# Altium PCB PCB1.PcbDoc
Units mil, origin at the board's own origin, x right, y up, seen from the top; angles counter-clockwise.
Board outline 1110 x 1515 mil, 4 copper layers (Top Layer, Layer 1, Layer 2, Bottom Layer), stack 23.756 mil thick; 30 components, 43 nets, 163 pads, 46 vias.
Unrouted connection lines stored in the file: 21.
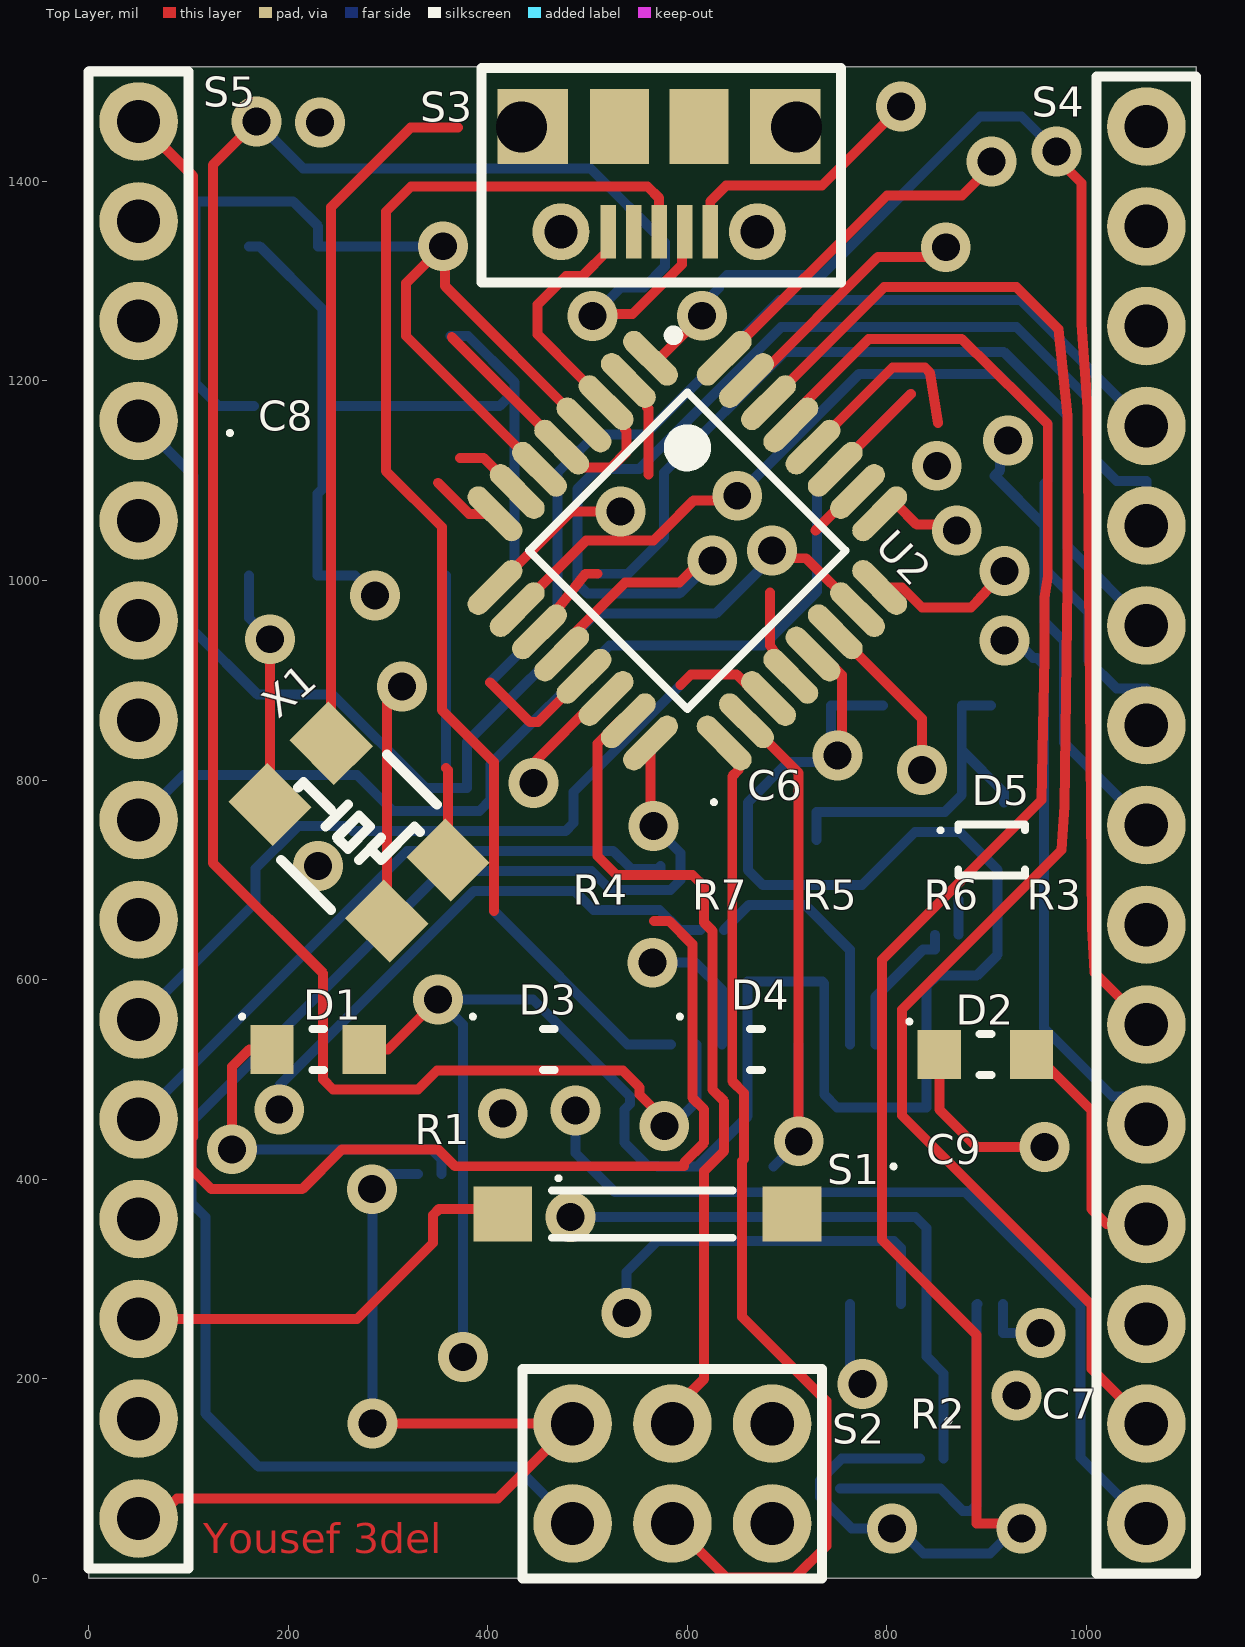
[diagram p0: Top Layer view]
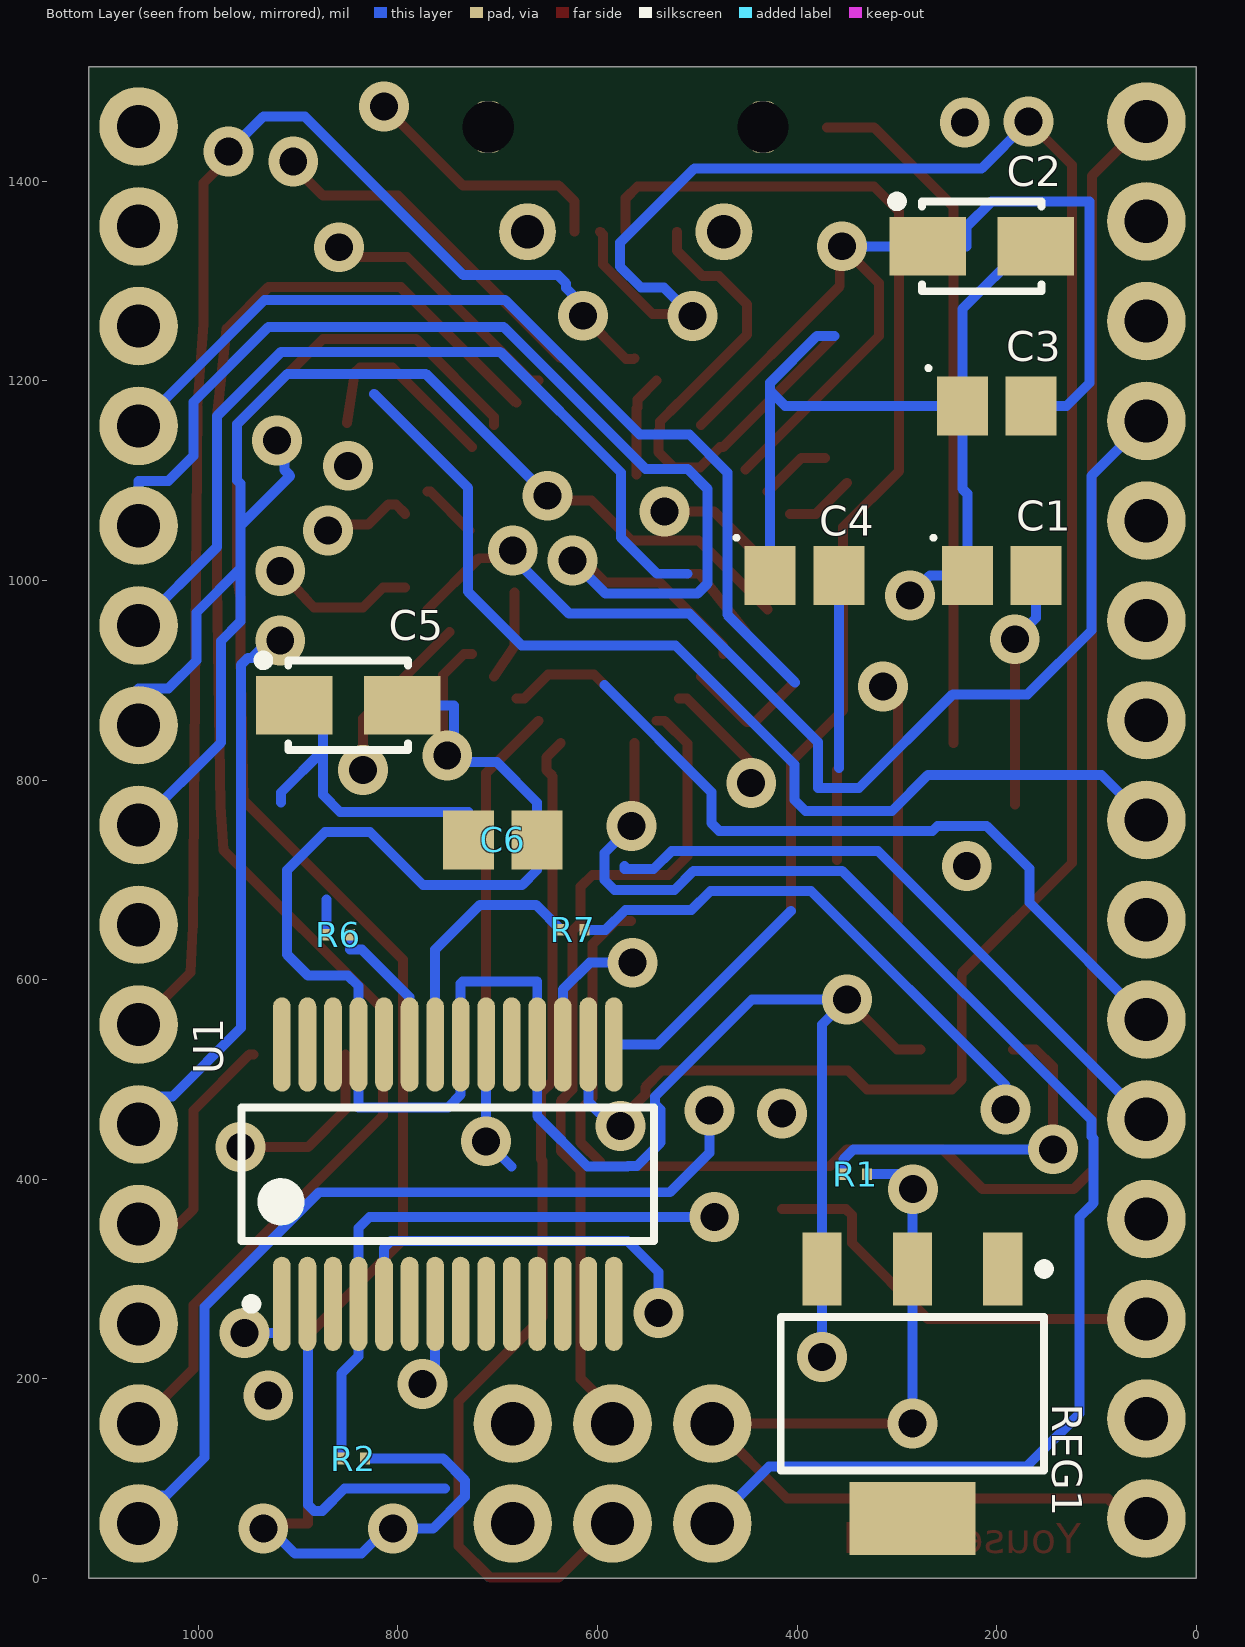
[diagram p1: Bottom Layer view, seen from below]
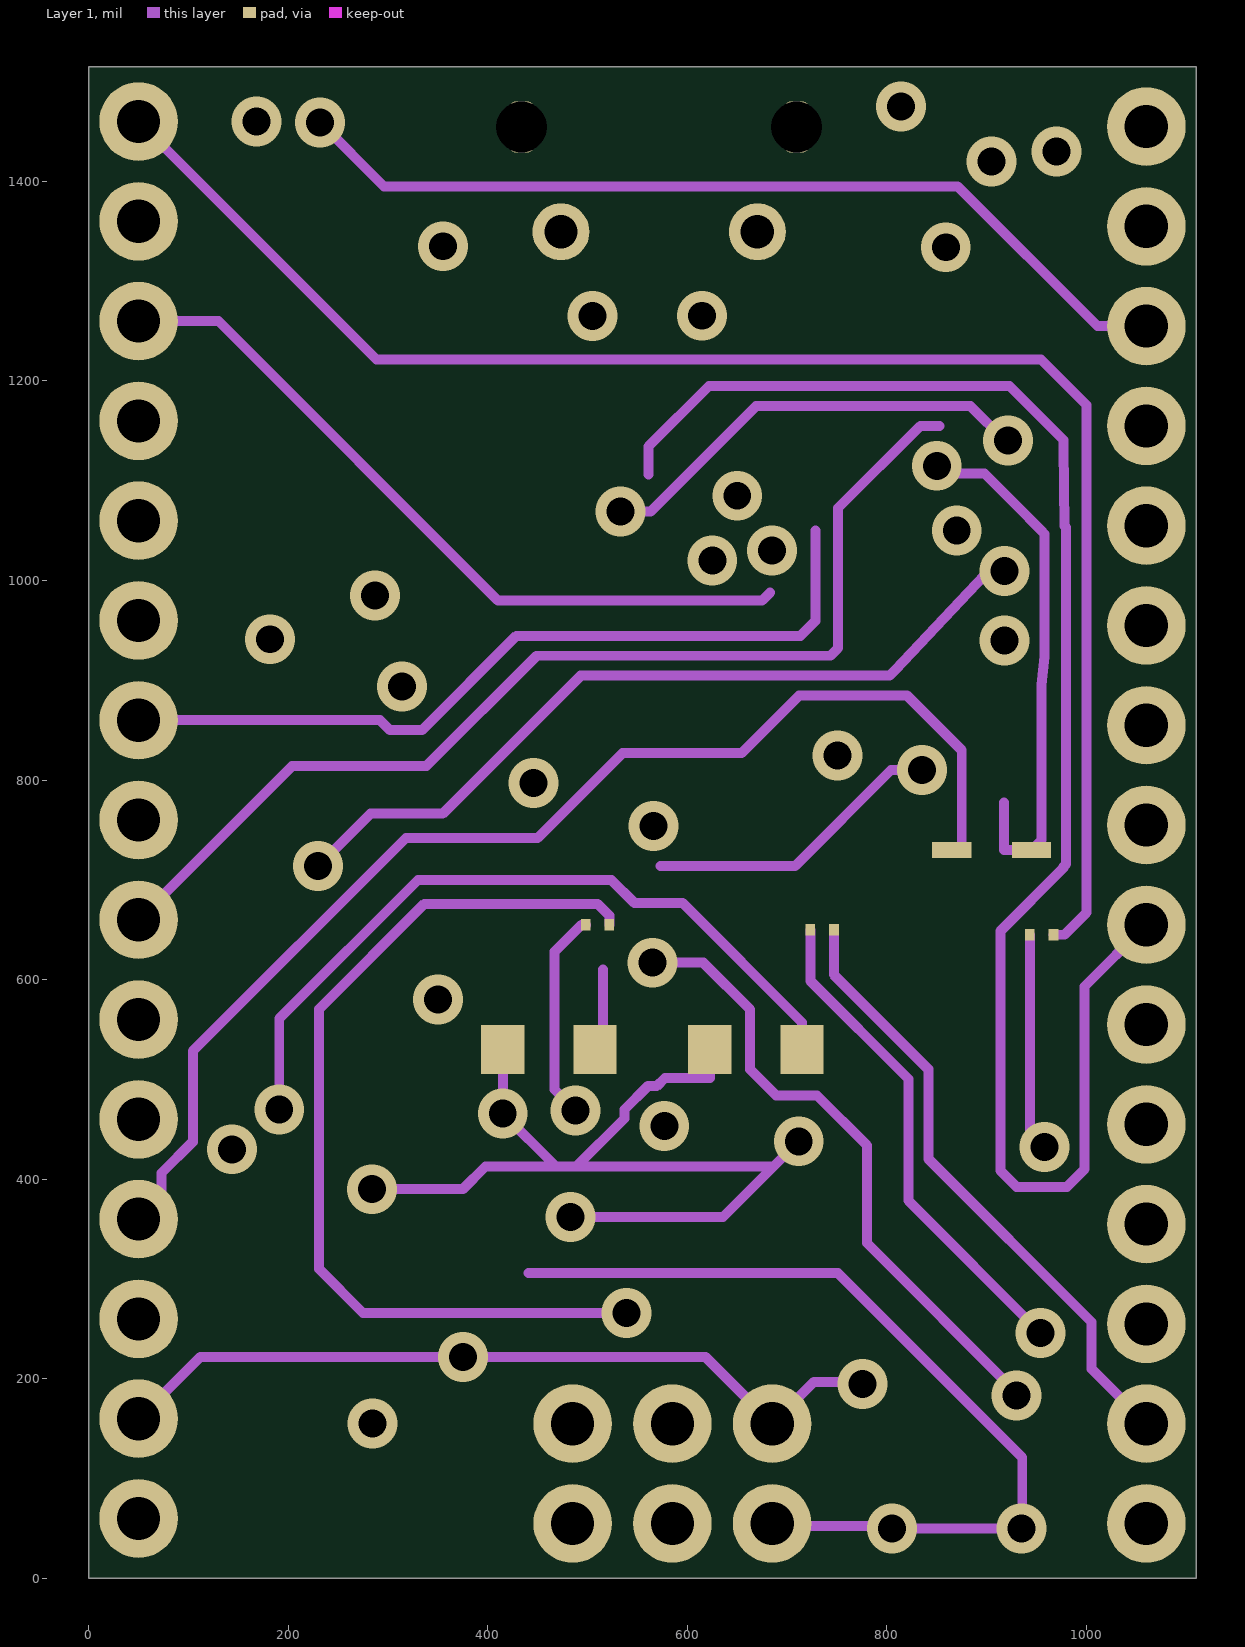
[diagram p2: Layer 1]
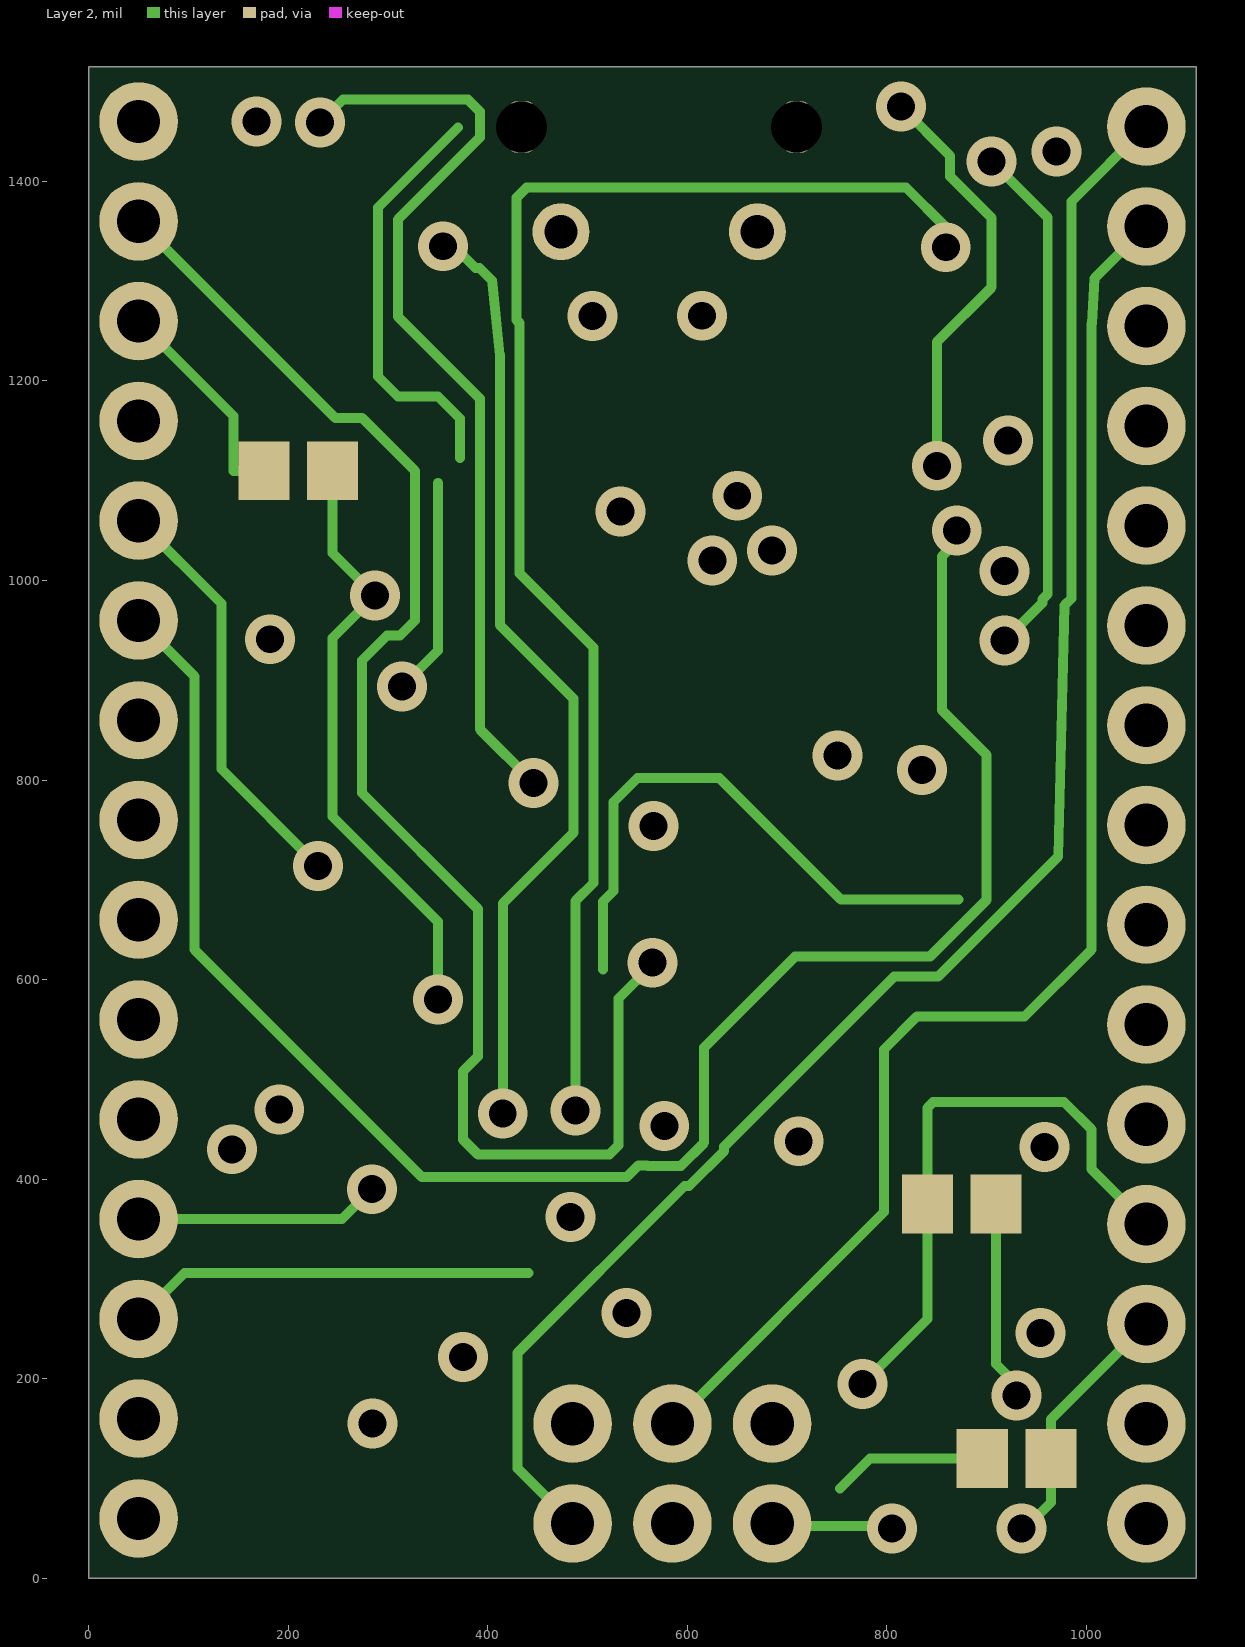
[diagram p3: Layer 2]

## Layer stack, top to bottom
Top Solder: solder mask 0.4, Solder Resist, Dk 3.5
Top Layer: signal copper 1.4
Dielectric 2: prepreg 2.8, PP-006, Dk 4.1
Layer 1: signal copper 1.378
Dielectric 1: dielectric 12.6, FR-4, Dk 4.8
Layer 2: signal copper 1.378
Dielectric 3: prepreg 2.8, PP-006, Dk 4.1
Bottom Layer: signal copper 1.4
Bottom Solder: solder mask 0.4, Solder Resist, Dk 3.5

## Board outline
0,0 1110,0 1110,1515 0,1515

## Design rules (kind name [scope] priority, off if disabled: settings)
Clearance [All] p1: gap=10 ignorepadtopadclearanceinfootprint=FALSE except(5: SMDPad-SMDPad)
PolygonConnect [All] p1: connectstyle=Relief reliefconductorwidth=10 reliefentries=4 polygonreliefangle="90 Angle" airgapwidth=10
RoutingVias [All] p1: holewidth=28 width=50 viastyle="Through Hole" minholewidth=28 minwidth=50 maxholewidth=28 maxwidth=50
SolderMaskExpansion [All] p1: expansion=4 istentingtop=FALSE
SupplyNets "Schematic Supply Nets_3" [InNet('VUSB')] p1: voltage=0.000
SupplyNets "Schematic Supply Nets_2" [InNet('AVCC')] p2: voltage=0.000
SupplyNets "Schematic Supply Nets_1" [InNet('+3V3')] p3: voltage=0.000
SupplyNets "Schematic Supply Nets" [InNet('GND')] p4: voltage=0.000
Width [All] p1: maxlimit=10 minlimit=10 preferedwidth=10
30 further rules are at their usual default settings.

## Components (designator, comment, footprint, x,y, rotation, side; value= is the part's Value field where it differs from the comment)
C1 "C0805C180J5GACTU" CAPCP2012X09N#1 195,1005 r180 bottom
C2 "Capacitor SMT Tantalum" "CASE A - 3216X18" 215,1335 r180 bottom value=4.7µF
C3 "100nF Ceramic Multilayer Capacitor_1" CAPCP2012X09N#1 200,1175 r180 bottom
C4 "C0805C180J5GACTU" CAPCP2012X09N#1 392.51,1005 r180 bottom
C5 "Capacitor SMT Tantalum" "CASE A - 3216X18" 850,875 r180 bottom value=4.7µF
C6 "100nF Ceramic Multilayer Capacitor_1" CAPCP2012X09N#1 695,740 r0 bottom
C7 "100nF Ceramic Multilayer Capacitor_1" CAPCP2012X09N#2 930,120 r0 top
C8 "100nF Ceramic Multilayer Capacitor_1" CAPCP2012X09N#3 210,1110 r0 top
C9 "100nF Ceramic Multilayer Capacitor_1" CAPCP2012X09N#3 875,375 r0 top
D1 "Kingbright Blue LED, 60 mcd 120 ° 0805" LED1913X12NBLUE 230,530 r0 top
D2 "Light-Emitting Diode" LED1913X12NRED#1 898.74,525 r0 top
D3 "Kingbright Red LED, 100 mcd 120 ° 0805" LED1913X12NRED#2 461.26,530 r0 top
D4 "Kingbright Green LED, 70 mcd 120 ° 0805" LED1913X12NGREEN 668.74,530 r0 top
D5 "Panasonic DB2J20900L Schottky Diode, 0.5A, 20V, 2.4ns, 2-Pin SMini2 F5 B" DIOM1712X07N 905,730 r0 top
R1 "Resistor" RES_ERJU01J183C#1 341.81,405 r0 bottom value=330
R2 "Resistor" RES_ERJU01J183C#1 845,120 r0 bottom value=1K
R3 "Resistor" RES_ERJU01J183C#2 955,645 r0 top value=1K
R4 "Resistor" RES_ERJU01J183C#2 510,655 r0 top value=1K
R5 "Resistor" RES_ERJU01J183C#2 735,650 r0 top value=1K
R6 "Resistor" RES_ERJU01J183C#1 860,645 r0 bottom value=330
R7 "Resistor" RES_ERJU01J183C#1 625,650 r0 bottom value=330
REG1 "LM1117MP-5.0/NOPB, Low Dropout Voltage Regulator, 1.5A, 5 V ±1%, 4-Pin SOT-223" SOT230P700X180-4N 284.45,185 r270 bottom
S1 "Button Tactile Switch, NO 0.05 A 0.8mm" Button8014X17N 555,365 r0 top
S2 "Programming Headers Dual Row" "ISP HEADER" -210,610 r0 top
S3 "NewMolex Right Angle SMT Female Type B Micro USB Connector, 30 V ac, 1.8A" MicroUSB 620.2,1349.57 r180 top
S4 "connector;str header;single row;.1 cont centers;.095 tail;gold or gtx;36 contact" Header 1060,55 r90 top
S5 "connector;str header;single row;.1 cont centers;.095 tail;gold or gtx;36 contact" Header 50,60 r90 top
U1 "FT232RL, Universal Asynchronous Receiver & Transmitter 3MBd, 28-Pin, SSOP" SOP65P780X200-28N 750,405 r90 bottom
U2 "ATMEGA328P-AU" TQFP80P900X900X120-32N 600,1030 r315 top
X1 "Aker 16MHz Crystal SMT" "Aker S5C Crystal" 360,720 r315 top value=16MHz

## Footprints (in the part's own frame and the unit in brackets; to place one, negate y for a bottom-side part, rotate by r counter-clockwise, add the part's x,y. Pads: shape width x height; smd on the part's side, far side on the other; paste and mask are expansions set on the pad)
"Aker S5C Crystal" [mm]
  rect 1.6x1.4 smd: 1(0,0) 2(-4.2,0) 3(0,-2.2) 4(-4.2,-2.2)
  round 0.254 on Top Overlay: 5(-3,-2.4)
  silkscreen extent -4,-3 -1,0.8, body extent -4.7,-2.8 0.5,0.6, height 1
Button8014X17N [mm] "Chip Inductor, 2-Leads, Body 8.00x1.40mm, IPC Medium Density"
  rect 1.5x1.4 smd: 1(-3.556,0) 2(3.81,0)
  silkscreen extent -2.3,-0.6 2.3,0.96, body extent -3.79,-1.92 4.21,1.78, height 2.5
CAPCP2012X09N#1 [mm] "Chip Capacitor, 2-Leads, Body 2.00x1.25mm, IPC Medium Density"
  rect 1.3x1.5 smd: 1(-0.875,0) 2(0.875,0)
  silkscreen extent -1.79,0.91 -1.69,1.01, body extent -1.05,-0.57 0.95,0.68, height 0.78
CAPCP2012X09N#2 [mm] "Chip Capacitor, 2-Leads, Body 2.00x1.25mm, IPC Medium Density"
  rect 1.3x1.5 on Mid2: 2(0.875,0) (-0.875,0)
  silkscreen extent -1.79,0.91 -1.69,1.01, body extent -1.05,-0.57 0.95,0.68, height 0.78
CAPCP2012X09N#3 [mm] "Chip Capacitor, 2-Leads, Body 2.00x1.25mm, IPC Medium Density"
  rect 1.3x1.5 on Mid2: 1(-0.875,0) 2(0.875,0)
  silkscreen extent -1.79,0.91 -1.69,1.01, body extent -1.05,-0.57 0.95,0.68, height 0.78
"CASE A - 3216X18" [mm] "Molded Capacitor, 2-Leads, Body 3.2x1.6mm, IPC Medium Density"
  rect 1.95x1.5 smd: 1(-1.375,0) 2(1.375,0)
  silkscreen extent -2.28,-1.14 1.52,1.27, body extent -1.52,-0.76 1.65,0.84, height 1.77
DIOM1712X07N [mm] "Molded Diode, 2-Leads, Body 1.70x1.25mm, IPC Medium Density"
  rect 1x0.4 on Mid1: 1(-1.016,0) 2(1.016,0)
  silkscreen extent -1.35,-0.65 0.85,0.65, body extent -0.9,-0.45 0.9,0.45, height 0.8
Header [mm] "SIL Header"
  round 2 hole 1.1: 1(0,0) 2(2.54,0) 3(5.08,0) 4(7.62,0) 5(10.16,0) 6(12.7,0) 7(15.24,0) 8(17.78,0) 9(20.32,0) 10(22.86,0) 11(25.4,0) 12(27.94,0) 13(30.48,0) 14(33.02,0) 15(35.56,0)
  silkscreen extent -1.27,-1.27 36.83,1.27, body extent -1.33,-1.35 36.93,1.35, height 8.6
"ISP HEADER" [mm] "SIL Header for programming"
  round 2 hole 1.1: 1(17.653,-14.097) 2(17.653,-11.557) 3(20.193,-14.097) 4(20.193,-11.557) 5(22.733,-14.097) 6(22.733,-11.557)
  silkscreen extent 16.38,-15.49 24,-10.16, body extent 16.38,-15.37 24,-10.29, height 8
LED1913X12NBLUE [mm] "LED 2-Leads, Body 1.90x1.32mm, IPC Medium Density"
  rect 1.1x1.25 smd: 1(-1.175,0) 2(1.175,0)
  silkscreen extent -1.99,-0.53 0.15,0.89, body extent -1,-0.62 1.02,0.62, height 1.1
LED1913X12NGREEN [mm] "LED 2-Leads, Body 1.90x1.32mm, IPC Medium Density"
  rect 1.1x1.25 on Mid1: 1(-1.175,0) 2(1.175,0)
  silkscreen extent -1.99,-0.53 0.15,0.89, body extent -1.01,-0.62 1.01,0.63, height 1.1
LED1913X12NRED#1 [mm] "LED 2-Leads, Body 1.90x1.32mm, IPC Medium Density"
  rect 1.1x1.25 smd: 1(-1.175,0) 2(1.175,0)
  silkscreen extent -1.99,-0.53 0.15,0.89, body extent -1.02,-0.43 1.04,0.47, height 0.85
LED1913X12NRED#2 [mm] "LED 2-Leads, Body 1.90x1.32mm, IPC Medium Density"
  rect 1.1x1.25 on Mid1: 1(-1.175,0) 2(1.175,0)
  silkscreen extent -1.99,-0.53 0.15,0.89, body extent -1.02,-0.43 1.04,0.47, height 0.85
MicroUSB [mm] "MicroUSB  Molex 5Pin"
  rect 0.4x1.35 smd: 1(-0.07,0) 2(0.58,0) 3(1.23,0) 4(1.88,0) 5(2.53,0)
  rrect50% 0.6x1.3 hole 1.3: ""(-2.27,-2.667) ""(-2.27,-2.667) ""(4.73,-2.667)
  rect 1.8x1.9 smd: ""(-1.98,-2.678) ""(4.45,-2.678)
  round 1.45 hole 0.85: ""(-1.27,0) ""(3.73,0)
  rect 1.5x1.9 smd: ""(0.218,-2.678) ""(2.242,-2.678)
  silkscreen extent -3.39,-4.17 5.75,1.3, body extent -2.83,-5.32 5.37,0.11, height 2.68
RES_ERJU01J183C#1 [mm]
  rect 0.25x0.3 smd: 1(-0.3,0) 2(0.3,0)
  body extent -0.3,-0.15 0.3,0.15, height 0.23
RES_ERJU01J183C#2 [mm]
  rect 0.25x0.3 on Mid1: 1(-0.3,0) 2(0.3,0)
  body extent -0.3,-0.15 0.3,0.15, height 0.23
SOP65P780X200-28N [mm] "SOP, 28-Leads, Body 10.20x5.30mm, Pitch 0.65mm, IPC Medium Density"
  oval 2.4x0.45 smd: 1(-3.3,4.225) 2(-3.3,3.575) 3(-3.3,2.925) 4(-3.3,2.275) 5(-3.3,1.625) 6(-3.3,0.975) 7(-3.3,0.325) 8(-3.3,-0.325) 9(-3.3,-0.975) 10(-3.3,-1.625) 11(-3.3,-2.275) 12(-3.3,-2.925) 13(-3.3,-3.575) 14(-3.3,-4.225) 15(3.3,-4.225) 16(3.3,-3.575) 17(3.3,-2.925) 18(3.3,-2.275) 19(3.3,-1.625) 20(3.3,-0.975) 21(3.3,-0.325) 22(3.3,0.325) 23(3.3,0.975) 24(3.3,1.625) 25(3.3,2.275) 26(3.3,2.925) 27(3.3,3.575) 28(3.3,4.225)
  silkscreen extent -3.42,-5.25 1.7,5.25, body extent -3.91,-5.1 3.91,5.1, height 2
SOT230P700X180-4N [mm] "SOT223, 4-Leads, Body 6.50x7.00mm (avg), Pitch 2.30mm, IPC Medium Density"
  rect 1.85x1 smd: 1(-3.175,2.3) 2(-3.175,0) 3(-3.175,-2.3)
  rect 1.85x3.2 smd: 4(3.175,0)
  silkscreen extent -3.3,-3.35 1.95,3.47, body extent -3.8,-3.12 3.29,3.38, height 1.65
TQFP80P900X900X120-32N [mm] "TQFP, 32-Leads, Body 7.00x7.00mm, Pitch 0.80mm, IPC Medium Density"
  oval 1.75x0.55 smd: 1(-4.125,2.8) 2(-4.125,2) 3(-4.125,1.2) 4(-4.125,0.4) 5(-4.125,-0.4) 6(-4.125,-1.2) 7(-4.125,-2) 8(-4.125,-2.8) 17(4.125,-2.8) 18(4.125,-2) 19(4.125,-1.2) 20(4.125,-0.4) 21(4.125,0.4) 22(4.125,1.2) 23(4.125,2) 24(4.125,2.8)
  oval 0.55x1.75 smd: 9(-2.8,-4.125) 10(-2,-4.125) 11(-1.2,-4.125) 12(-0.4,-4.125) 13(0.4,-4.125) 14(1.2,-4.125) 15(2,-4.125) 16(2.8,-4.125) 25(2.8,4.125) 26(2,4.125) 27(1.2,4.125) 28(0.4,4.125) 29(-0.4,4.125) 30(-1.2,4.125) 31(-2,4.125) 32(-2.8,4.125)
  silkscreen extent -4.25,-2.85 2.85,3.75, body extent -4.44,-4.5 4.56,4.5, height 1.6

## Part data
C1 C4: library part "18pF Ceramic Multilayer Capacitor, 50 V dc C0G Dielectric ±5% SMD", "18pF Ceramic Multilayer Capacitor, 50 V dc C0G Dielectric ±5% SMD", Capacitance=18pF, Manufacturer=Kemet, Package=0805, Voltage=50V, Creator="Ritesh Kanjee", Datasheet URL=http://za.rs-online.com/web/p/ceramic-multilayer-capacitors/6480935/?searchTerm=C0805C180J5GACTU&relevancy-data=636F3D3226696E3D4931384E4B6E6F776E41734D504E266C753D656E266D6D3D6D61746368616C6C7061727469616C26706D3D5E5B5C707B4C7D5C707B4E647D2D2C2F255C2E5D2B2426706F3D313326736E3D592673743D4D414E5F504152545F4E554D4245522677633D424F5448267573743D4330383035433138304A35474143545526, Date Created="18 February 2015", RS Stock No.=648-0935
C2 C5: library part "4.7µF Tant RS 496-3545", "Capacitor,tantalum,SMT,16V,4.7uF,10%,A-case", Package=3216-18, Tolerance=10%, Voltage=16V, ComponentLink1Description="Supplier Website", ComponentLink1URL=http://za.rs-online.com/web/search/searchBrowseAction.html?method=getProduct&R=4963545, ComponentLink2Description="RS Data sheet", ComponentLink2URL=http://docs-europe.origin.electrocomponents.com/webdocs/04ed/0900766b804ed4cc.pdf, LatestRevisionDate=28-April-2010, Part Originator="H Theron", Publisher=DPSS, RS Stock Nr.=496-3545
C3 C6 C7 C8 C9: "AVX 0805 Standard 100nF Ceramic Multilayer Capacitor, 50 V dc X7R Dielectric ±10% SMD", Capacitance=100nF, Manufacturer=AVX, Package=0805, Voltage=50V, Creator="Ritesh Kanjee", Datasheet URL=http://za.rs-online.com/web/p/ceramic-multilayer-capacitors/4646688/, Date Created="18 February 2015", RS Stock No.=464-6688
D1: Color=Blue, Forward Voltage=3.2V, Manufacturer=KingBright, Manufacturer Part No.=KP-2012PBC-A, Creator="Ritesh Kanjee", Datasheet URL=http://za.rs-online.com/web/p/visible-leds/4663784/, Date Created="18 February 2015", RS Stock No.=466-3784
D2: library part LED, AF=1, BV=0, BV_MAX=1e99, CJO=0, CJP=0, CTA=0, CTP=0, EG=1.11, FC=0.5, FCS=0.5, FV_MAX=1e99, IBV=0.001, IKF=0, IKR=0, IS=1e-14, ISR=1e-14, JSW=0, JTUN=0, JTUNSW=0, KEG=1, KF=0, LEVEL=1, MJSW=0.33, N=1, NBV=1, NR=1, NS=1, NTUN=30, PHP=1, RS=0, SimulationGenericComponent=True, TCV=0, TLEV=0, TLEVC=0, TM1=0, TM2=0, TNOM=27, TPB=0, TPHP=0, TRS=0, TRS2=0, TT=0, TTT1=0, TTT2=0, VJ=1, XTI=3, XTITUN=3
D3: Color=RED, Forward Voltage=1.85V, Manufacturer=KingBright, Manufacturer Part No.=KP-2012SRC-PRV, Creator="Ritesh Kanjee", Datasheet URL=http://za.rs-online.com/web/p/visible-leds/4663813/, Date Created="18 February 2015", RS Stock No.=466-3813
D4: Color=Green, Forward Voltage="2.1 V", Manufacturer=KingBright, Manufacturer Part No.=KP-2012MGC, Creator="Ritesh Kanjee", Datasheet URL=http://za.rs-online.com/web/p/visible-leds/4663778/, Date Created="18 February 2015", RS Stock No.=466-3778
D5: library part "Schottky Diode, 0.5A, 20V, 2.4ns, 2-Pin SMini2 F5 B", Manufacturer=Panasonic, Manufacturer Part No.=DB2J20900L, Maximum Continuous Forward Current=0.5A, Peak Reverse Repetitive Voltage=20V, Created By="R Kanjee", Datasheet=http://docs-europe.electrocomponents.com/webdocs/1398/0900766b813986b3.pdf, Date Created="1 March 2015", RS Stock No.=713-2703
REG1: library part LM1117MP-5.0, Manufacturer="Texas Instruments", Maximum Input Voltage=15V, Output Voltage=5V, Supply Current=1.5Amps, Created By="R Kanjee", Datasheet URL=http://za.rs-online.com/web/p/low-dropout-voltage-regulators/5339583/, Date Created="26 February 2015", RS Stock No.=533-9583
S1: Manufacturer="C & K", Manufacturer Part No.=B3F1000, Creator="R Kanjee", Date Created="25 February 2015", RS Stock No.=516-255, State="Normaly Open"
S2: library part "Programming ISP, Programming Headers Dual Row", Current Rating="3Amps Continuous", Manufacturer=FCI, Manufacturer Part No.=68000-236HLF, Created By="R Kanjee", Date Created="1 March 2015", RS Stock No.=2509565626
S3: library part "Micro USB Connector, 30 V ac, 1.8A", Manufacturer=Molex, Manufacturer Part No.=105017-0001, Max Current=1.8A, Max Voltage=30V, Creator="R Kanjee", Datasheet URL=http://za.rs-online.com/web/p/micro-usb-connectors/8486764/, Date Created="28 February 2015", RS Stock No=848-6764
S4 S5: library part "Single row; PCB headers", Current Rating="3Amps Continuous", Manufacturer=FCI, Manufacturer Part No.=68000-236HLF, Created By="R Kanjee", Date Created="1 March 2015", RS Stock No.=2509565626
U1: library part "FT232RL USB to UART, Universal Asynchronous Receiver & Transmitter 3MBd, 28-Pin, SSOP", Manufacturer="FTDI Chip", Manufacturer Part No.=FT232RL, Creator="R Kanjee", Date Created="03 March 2015", Pin Count=28, RS Stock No.=406-580
U2: "ATMEGA328P-AU, 8 bit AVR Microcontroller 20MHz 1 kB, 32 kB Flash, 2 kB RAM, I2C 32-Pin TQFP", Company="Lumina Inova", Created By="Ritesh Kanjee", Datasheet URL=http://docs-europe.electrocomponents.com/webdocs/0db4/0900766b80db4deb.pdf, Date Created="14 February 2015", RS Stock No.=696-3092
X1: library part "Aker  C5S-16.000-12-3030-X", "Aker S5C SMT Crystal", Frequency Stability=+/-30ppm, Load Capacitance=12pF, Manufacturer=Aker, Manufacturer Part #=C5S-16.000-12-3030-X, Package="3.2x5mm SMD", Creator="R Kanjee", HelpURL=http://za.rs-online.com/web/p/crystal-units/6719488/, RS="RS 671-9488", RS Stock Nr.=671-9488, Supplier=RS
R1 R2 R3 R4 R5 R6 R7: SimulationGenericComponent=True, TC1=0, TC2=0

## Via types
v1: diameter 50, hole 28, Top Layer to Bottom Layer, 46 vias

## Nets (pads, with @x,y where several pads share a name; then routed paths per layer and width w, separated by ;. In a path a pad name is that pad's centre, name@x,y a point inside that pad or via, vN(x,y) a via of type N, cw(c..) or ccw(c..) an arc to the next point about the centre after c; other vN are vias at no path point)
+3V3: C9.2 S5.14 U1.17 | length 2472.3
  Layer 1 w10: v1(565,617) 616,617 663,570 663,510 689,484 730,484 780,434 780,336 930,186 v1(930,183.39)
  Layer 2 w10: S5.14 247.15,1162.85 274.15,1162.85 326.99,1110 326.99,960 311.99,945 299,945 274,920 274,787 390,671 390,523 375,508 375,440 390,425 522,425 530.98,433.98 530.98,580.98 565,615 v1(565,617) ; C9.2 909.45,214.76 930,194.21 v1(930,183.39)
  Bottom Layer w10: v1(565,617) 607.84,617 634.84,590 U1.17
A0: S5.12 U2.23 | length 1117.6
  Top Layer w10: v1(685,1030) 692.65,1022.35 719.01,1022.35 U2.23
  Bottom Layer w10: S5.12 105,1105 105,950 169,886 244,886 338,792 379,792 379,838 507.81,966.81 628.38,966.81 685,1023.43 v1(685,1030)
A1: S5.11 U2.24 | length 1382.2
  Top Layer w10: U2.24 815,993.11 835.11,973 884.29,973 890.15,978.86 v1(918,1009.58)
  Layer 1 w10: v1(230,714) 282.35,766.35 354.86,766.35 493.13,904.62 802.48,904.62 808.33,910.48 898.03,1005.4 913.82,1005.4 v1(918,1009.58)
  Layer 2 w10: S5.11 133,977 133,811 v1(230,714)
A2: S5.10 U2.25 | length 1900
  Top Layer w10: U2.25 802.15,1076.25 809.76,1076.25 830,1056.01 863.99,1056.01 v1(870,1050)
  Layer 2 w10: S5.10 106,904 106,630 334,402 539,402 550.98,413.98 559.54,413.98 560.32,413.2 593.45,413.2 616.89,436.64 616.89,531.89 708,623 843,623 900,680 900,825.16 855,870.16 855,1024.18 870,1039.18 v1(870,1050)
A3: S5.9 U2.26 | length 876.8
  Top Layer w10: 728.2,1050 767.36,1089.16 U2.26
  Layer 1 w10: S5.9 292,860 302,850 334,850 428.62,944.62 713.4,944.62 728.2,959.41 728.2,1050
A4: S5.8 U2.27 | length 1169.8
  Top Layer w10: U2.27 824,1187.19
  Bottom Layer w10: S5.8 95,805 269,805 305,769 391.55,769 402.55,780 402.55,815.62 521.94,935 676,935 729.82,988.82 729.82,1093.01 824,1187.19
A5: S5.7 U2.28 | length 1293.4
  Top Layer w10: U2.28 805.68,1213.41 838.07,1213.41 843.31,1208.17 851.11,1157.85
  Layer 1 w10: S5.7 204,814 338.37,814 448.99,924.62 743.4,924.62 751,932.21 751,1072.57 833.43,1155 852.73,1155
A6: S5.6 U2.19 | length 827.1
  Top Layer w10: 593,895.19 603.51,905.7 649.48,905.7 673.42,881.76 U2.19
  Bottom Layer w10: S5.6 167.19,677.19 167.19,711.29 210,754.11 259.29,754.11 264.39,749 478.12,749 486,756.88 486,788.19 593,895.19
A7: S5.5 U2.22 | length 1121.4
  Top Layer w10: U2.22 835,861.81 v1(835,810)
  Layer 1 w10: 573,714 708.09,714 804.09,810 v1(835,810)
  Bottom Layer w10: S5.5 319,729 525.7,729 543.88,710.82 573,710.82 573,714
AREF: C8.1 S5.13 U2.20 | length 1062.5
  Top Layer w10: 683,988 683,934.73 U2.20
  Layer 1 w10: S5.13 130,1260 410,980 675,980 683,988
  Layer 2 w10: S5.13 145,1165 145,1110 C8.1
AVCC: C2.1 C3.2 D3.1 D4.1 D5.1 R1.1 R2.2 REG1.2 S2.2 S5.1 S5.4 U1.4 U1.20 U2.4 U2.6 U2.18 | length 6673.6
  Top Layer w10: S5.1 68.6,60 88.6,80 410,80 S2.2 v1(284.45,155) ; U2.6 318,1245.19 318,1298 v1(355,1335) 357.27,1332.73 357.27,1295 U2.4 ; U2.18 711.61,807.03 v1(711.61,438)
  Layer 1 w10: S5.4 73,360 73,406.11 104.37,437.48 104.37,528.37 318,742 450,742 535,827 654.35,827 711.97,884.62 820.38,884.62 875,830 875,730 D5.1 ; v1(284,390) 284.45,390 375,390 397.68,412.68 468.32,412.68 ; D3.1 v1(415,466) 468.32,412.68 ; v1(483,362) 635.61,362 686.29,412.68 ; D4.1 622.48,501.48 577.53,501.48 569.25,493.2 560.32,493.2 536.89,469.77 536.89,460.84 488.72,412.68 ; v1(711.61,438) 686.29,412.68 ; 468.32,412.68 488.72,412.68 ; 488.72,412.68 686.29,412.68
  Layer 2 w10: S5.4 254,360 v1(284,390) ; v1(355,1335) 365.82,1335 387.62,1313.2 391.8,1313.2 404.27,1300.73 404.64,1297.2 412,1226.04 412,955.59 486,881.59 486,747.24 415,676.24 v1(415,466)
  Bottom Layer w10: C3.2 130,1175 107,1198 107,1380 205,1380 230,1355 230,1335 v1(355,1335) ; v1(284.45,155) REG1.2 284.45,389.55 v1(284,390) 284.45,390 299.45,405 R1.1 ; v1(483,362) 828.57,362 839.57,351 U1.4 839.57,222.49 856.81,205.25 R2.2 ; 686.29,412.68 v1(711.61,438) U1.20
D0/RX: R5.2 S4.2 U2.30 | length 2246.1
  Top Layer w10: U2.30 797.19,1294 930,1294 969.26,1254.74 972.07,1251.93 981.2,1165.08 981.2,995.47 977.94,773.86 975.07,730.07 815,570 815,464 1005,274 1005,210 S4.2
  Layer 1 w10: R5.2 746.81,605 841.5,510.31 841.5,420.5 1005,257 1005,210 S4.2
D1/TX: R4.1 S4.1 U2.31 | length 2808.9
  Top Layer w10: U2.31 667.17,1200.51 790.85,1324.2 859,1324.2 v1(859,1334)
  Layer 1 w10: v1(488,469) 467,490 467,628 494,655 R4.1
  Layer 2 w10: v1(488,469) 488,679 506,697 506,933 432,1007 432,1257.9 429,1260.9 429,1384 439,1394 819,1394 859,1354 v1(859,1334)
  Bottom Layer w10: v1(488,469) 488,426.39 527.45,386.94 879.06,386.94 994,272 994,121 1032,83 ; 1032,83 1060,83 S4.1 1032,83
D2: S4.5 U2.32 | length 1446.1
  Top Layer w10: U2.32 800.1,1386 875.36,1386 905,1415.64 v1(905,1420)
  Layer 2 w10: v1(905,1420) 961.2,1363.8 961.2,986.63 955.71,981.14 955.71,977.71 952.81,974.81 v1(918,940)
  Bottom Layer w10: v1(918,940) 928.82,940 946.27,922.55 950.45,922.55 957.52,915.48 957.52,551.48 1026,483 1060,483 S4.5
D3: S4.6 U2.1 | length 1438.6
  Top Layer w10: U2.1 563.79,1222.11 571.4,1222.11 v1(614.65,1265.35) ; v1(970,1430) 970,1423.43 995,1398.43 995,1257.36 995,1257.25 1001.17,1173.69 1005.63,654.47 ccw(c1060,655) 1005.69,652.39 1007.86,607.13 1007.93,607.07 S4.6
  Bottom Layer w10: v1(614.65,1265.35) 614.65,1276.18 631.62,1293.15 631.62,1297.88 639.74,1306 734.43,1306 893.43,1465 935,1465 v1(970,1430)
D4: S4.7 U2.2 | length 1724
  Top Layer w10: U2.2 559.78,1181.58 559.78,1173.56 561.1,1172.24 561.1,1106.1
  Layer 1 w10: 561.1,1106.1 561.1,1134.54 621.56,1195 922.99,1195 977.07,1140.92 977.07,1132.93 978,1054.88 979.69,1053.2 979.69,715.91 977.07,713.3 977.07,712.07 913.62,648.62 913.62,408.76 930,392.38 980.38,392.38 998,410 998,593 S4.7
D5: S4.8 U2.9 | length 1057.4
  Top Layer w10: U2.9 483.1,1069 v1(533,1069)
  Layer 1 w10: v1(533,1069) 563,1069 669,1175 883.61,1175 918.38,1140.23 v1(921.2,1140.23)
  Bottom Layer w10: v1(921.2,1140.23) 913.54,1132.57 913.54,1110.54 908,1105 958,1055 958,959.05 977.52,939.53 977.52,837.48 S4.8
D6: S4.9 U2.10 | length 1013.4
  Top Layer w10: U2.10 498.65,1040 566,1040 576,1050 606,1080 645,1080 v1(650,1085)
  Bottom Layer w10: v1(650,1085) 772.19,1207.19 910.81,1207.19 961.2,1156.8 961.2,1100.38 958,1097.19 958,1012 1002,968 1002,920 1030,892 1060,892 S4.9
D7: S4.10 U2.11 | length 957.2
  Top Layer w10: U2.11 498.03,1006.81 510,1006.81
  Bottom Layer w10: 510,1006.81 540.49,1006.81 576.56,1042.88 576.56,1108.24 697.53,1229.21 917.07,1229.21 981.2,1165.08 981.2,1033.8 S4.10
D8: S4.11 U2.12 | length 1220.1
  Top Layer w10: U2.12 474.03,934.32 537.71,998 592.18,998 614.18,1020 v1(625,1020)
  Bottom Layer w10: v1(625,1020) 591.81,986.81 500,986.81 490,996.81 490,1092 510,1112 552.03,1112 694.03,1254 930,1254 1005,1179 1005,1125 1030,1100 1060,1100 S4.11
D9: S4.12 U2.13 | length 1081.8
  Top Layer w10: 402.27,898 442.13,858.14 450.41,858.14 U2.13
  Bottom Layer w10: 402.27,898 470,965.73 470,1108.38 507.94,1146.32 557.77,1146.32 692.55,1281.1 933.9,1281.1 S4.12
D10: S4.13 U2.14 | length 1969.8
  Top Layer w10: v1(446,797) 446,817.2 510.56,881.76 U2.14
  Layer 1 w10: v1(232,1459) 296,1395 871,1395 1011,1255 S4.13
  Layer 2 w10: v1(232,1459) 255,1482 380,1482 392,1470 392,1444 310,1362 310,1264.37 392,1182.37 392,851 v1(446,797)
D11/MOSI: S2.4 S4.14 U2.15 | length 2299.8
  Top Layer w10: U2.15 532.83,859.49 510,836.66 510,724 529,705 605.17,705 616.89,693.28 616.89,657.11 625,649 625,489.94 636.89,478.06 636.89,428.35 616.89,408.35 616.89,200 585,168.12 S2.4
  Layer 2 w10: S2.4 797,367 797,530 830,563 938,563 1005,630 1005,1256.98 1005.7,1257.68 1007.93,1302.93 S4.14
D12/MISO: S2.1 S4.15 U2.16 | length 3177.3
  Top Layer w10: U2.16 563.11,756.89 v1(566,754)
  Layer 2 w10: S2.1 430,110 430,226 597.2,393.2 601.74,393.2 636.89,428.35 636.89,432.89 807,603 851.29,603 971.71,723.43 978,975.15 985,982.15 985,1380 S4.15
  Bottom Layer w10: S2.1 428,112 170,112 117,165 117,362 103,376 103,441 105,443 105,459.24 354.76,709 504,709 523,690 583,690 593,700 593,727 v1(566,754)
D13/SCK: R3.2 S2.3 S5.15 U2.17 | length 4546
  Top Layer w10: S5.15 104.37,1405.63 104.37,442.37 103,441 103,410 123,390 214,390 254,430 350,430 367,413 596.89,413 596.89,416.64 616.89,436.64 616.89,469.77 605,481.66 605,635.57 581.82,658.75 566.39,658.75 ; S2.3 639.37,0.63 707.52,0.63 739.37,32.48 739.37,177.52 655,261.89 655,418.18 656.89,420.07 656.89,486.34 645,498.23 645,803.83 651.36,810.19 651.36,822.74 U2.17
  Layer 1 w10: S5.15 288.4,1221.6 954.4,1221.6 1000.07,1175.93 1000.07,667.07 978,645 R3.2
GND: C1.1 C2.2 C3.1 C4.1 C5.2 C6.1 C8.2 C9.1 D1.2 D2.2 REG1.3 S2.6 S3.5 S4.4 S5.2 U1.7 U1.18 U1.21 U1.25 U2.3 U2.5 U2.21 | length 6096.6
  Top Layer w10: D1.2 300,530 v1(350,580) ; 363.87,1243.86 U2.5 477.18,1133.7 497.44,1113.44 523.7,1113.44 538.83,1128.57 538.83,1149.96 537.51,1151.29 537.51,1159.31 U2.3 518.39,1178.24 490,1206.63 450,1246.63 450,1276.57 478.43,1305 494.72,1305 520.59,1330.87 S3.5 ; U2.21 733.99,926.3 755,905.29 755,829 v1(750.61,824.61) ; D2.2 949,525 1005,469 1005,370 1020,355 S4.4
  Layer 1 w10: S5.2 112,222 v1(375,222) 618,222 S2.6 727,197 764,197 766.22,194.78 v1(775.45,194.78)
  Layer 2 w10: C8.2 244.45,1027.55 v1(286.99,985) 244.45,942.45 244.45,763.66 350,658.11 v1(350,580) ; v1(775.45,194.78) 840.55,259.88 C9.1 840.55,471.55 846.4,477.4 977.6,477.4 1005,450 1005,410 S4.4
  Bottom Layer w10: C2.2 171.45,1335 234.45,1272 C3.1 ; v1(286.99,985) 266.99,1005 C1.1 229.45,1087 234.45,1092 C3.1 ; 362.73,1245 380.24,1245 426.96,1198.28 426.96,1190 ; v1(375,222) REG1.3 375,555 v1(350,580) 445.29,580 542.48,482.81 542.48,475.37 536.89,469.77 536.89,436.64 560.32,413.2 569.47,413.2 570,412.68 610,412.68 660.43,463.11 U1.18 660.43,598 735.47,598 737.2,596.27 U1.21 737.2,484.8 750,472 839.57,472 U1.25 839.57,593.57 850,604 890,604 911,625 911,710 873,748 828,748 775,695 675.55,695 660.55,710 C6.1 660.55,777.55 701,818 744,818 v1(750.61,824.61) ; C4.1 426.96,1190 ; v1@744,822.5 744,875 C5.2 ; U1.7 762.8,202.86 770.87,194.78 v1(775.45,194.78) ; C3.1 411.96,1175 426.96,1190
  other v1: 775.45,194.78
NetC1_2: C1.2 X1.4 | length 238.1
  Top Layer w10: X1.4 v1(181.83,941.17)
  Bottom Layer w10: C1.2 160.55,962.45 v1(181.83,941.17)
NetC4_2: C4.2 X1.1 | length 285.8
  Top Layer w10: 358.06,812.06 360,810.12 X1.1
  Bottom Layer w10: 358.06,812.06 C4.2
NetC7_1: C7. U1.2 | length 505.4
  Layer 2 w10: 753,90 783,120 C7.
  Bottom Layer w10: 753,90 853.57,90 875.86,67.72 884.14,67.72 890,73.57 890,274.33 U1.2
NetD1_1: D1.1 R1.2 | length 358.9
  Top Layer w10: v1(143.74,430) 143.74,512.74 161,530 D1.1
  Bottom Layer w10: v1(143.74,430) 343.62,430 353.62,420 R1.2
NetD2_1: D2.1 R3.1 | length 394.9
  Top Layer w10: D2.1 852.48,469.9 890,432.38 v1(958,432.38)
  Layer 1 w10: R3.1 943.19,447.19 v1(958,432.38)
NetD3_2: D3.2 R6.2 | length 697.1
  Layer 1 w10: D3.2 515.48,537.96 515.48,609.96
  Layer 2 w10: 515.48,609.96 515.48,678.2 526,688.72 526,778 550,802 632,802 753.81,680.19 871.81,680.19
  Bottom Layer w10: R6.2 871.81,680.19
NetD4_2: D4.2 R7.1 | length 1301.9
  Layer 1 w10: v1(191,470) 191,561 330,700 523.82,700 546.82,677 595,677 715,557 D4.2
  Bottom Layer w10: v1(191,470) 191,494 386,689 486.91,689 506,669.91 572.09,669.91 592,650 R7.1
NetR6_1: R6.1 U1.23 | length 142
  Bottom Layer w10: U1.23 788.39,582.39 836,630 848.19,630 R6.1
NetR7_2: R7.2 U1.22 | length 250.1
  Bottom Layer w10: R7.2 661.81,675 717.8,675 762.8,630 U1.22
NetS3_2: S3.2 U1.16 | length 2230.6
  Top Layer w10: v1(168,1460) 124.37,1416.37 124.37,717 235,606.37 235,500 245,490 330,490 349,509 535.3,509 552.17,492.13 552.17,485.06 576.89,460.34 v1(576.89,453.2) ; v1(505,1265) 507.13,1267.13 545,1267.13 594.65,1316.78 594.65,1346.85 S3.2
  Bottom Layer w10: v1(168,1460) 215,1413 503,1413 577.36,1338.64 577.36,1314.57 556.41,1293.61 533.61,1293.61 v1(505,1265) ; v1(576.89,453.2) 584.82,453.2 609.25,477.63 U1.16
NetS3_3: S3.3 U1.15 | length 1301.6
  Top Layer w10: 406,669 406,818 354,870 354,1053.53 298,1109.53 298,1370 323,1395 560,1395 571.77,1383.23 S3.3
  Bottom Layer w10: 406,669 540.08,534.92 U1.15
RESET: C7.2 R2.1 S1.1 S2.5 S4.3 S5.3 U2.29 | length 4083.5
  Top Layer w10: S5.3 269,260 345,336 345,364.14 350.86,370 S1.1@415,370 ; U2.29 703.7,1163.99 781.71,1242 875,1242 937.77,1180.23 961.2,1156.8 961.2,1003.76 958,982.83 958,923.43 955.07,780.07 795,620 795,339 890,244 890,55 930,55 v1(935,50)
  Layer 1 w10: 441,306 750.82,306 935.63,121.19 935.63,50.63 v1(935,50) v1(805,50) 797.5,57.5 792.5,52.5 687.5,52.5 S2.5
  Layer 2 w10: S5.3 96,306 441,306 ; S2.5 687.5,52.5 802.5,52.5 v1(805,50) ; v1(935,50) 938.52,50 964.45,75.93 C7.2 964.45,159.45 S4.3
  Bottom Layer w10: R2.1 754.72,120 733,98.28 733,81.72 764.72,50 790,50 805,65 805,56.57 836.57,25 903.43,25 928.43,50 v1(935,50)
RX: R5.1 U1.1 | length 566.3
  Layer 1 w10: R5.1 723.19,598.81 821.5,500.5 821.5,378.5 v1(954,246)
  Bottom Layer w10: U1.1 916.34,246 v1(954,246)
TX: R4.2 U1.5 | length 1323.1
  Layer 1 w10: R4.2 521.81,664.19 510,676 336.35,676 231,570.65 231,310 275,266 v1(539,266)
  Bottom Layer w10: v1(539,266) 539,307 570,338 807,338 813.98,331.02 U1.5
VUSB: C5.1 C6.2 D5.2 S3.1 | length 1583.6
  Top Layer w10: S3.1 622.95,1380 638.95,1396 735,1396 v1(814,1475)
  Layer 1 w10: v1(850,1115) 857.65,1107.35 897.65,1107.35 928.9,1076.1 955.12,1049.49 958,1046.57 958,923.43 955,895.41 955,740 D5.2 917.35,730 917.35,777.65
  Layer 2 w10: v1(814,1475) 863.33,1425.67 863.33,1405.1 905,1363.43 905,1294 850,1239 v1(850,1115)
  Bottom Layer w10: C6.2 729.45,768 858,768 875,785 875,830 ; C5.1 875,875 875,830 ; 917.35,777.65 917.35,787.65 875,830
XTAL1: U2.7 X1.2 | length 1190.4
  Top Layer w10: X1.2 243.08,1374.36 322.71,1454 370,1454 ; 372,1123 395.65,1123 U2.7
  Layer 2 w10: 370,1454 290,1374 290,1204.37 310,1184.37 350,1184.37 372,1162.37 372,1123
XTAL2: U2.8 X1.3 | length 530.6
  Top Layer w10: X1.3 298.75,878.75 v1(314,894) ; 350,1098 381.11,1066.89 U2.8
  Layer 2 w10: v1(314,894) 350,930 350,1098
pads on no net: REG1.1 REG1.4 S1.2 S3. S3.4 U1.3 U1.6 U1.8 U1.9 U1.10 U1.11 U1.12 U1.13 U1.14 U1.19 U1.24 U1.26 U1.27 U1.28 X1.5

## Other copper
Top Layer:
  text "Yousef 3del" at 115,25 h30